# Altium PCB pcb.PcbDoc (part 2 of 2)
Units mm, origin at the board's own origin, x right, y up, seen from the top; angles counter-clockwise.
Board outline 150 x 136 mm, 2 copper layers (Top Layer, Bottom Layer); 100 components, 101 nets, 620 pads, 663 vias.
Unrouted connection lines stored in the file: 2.
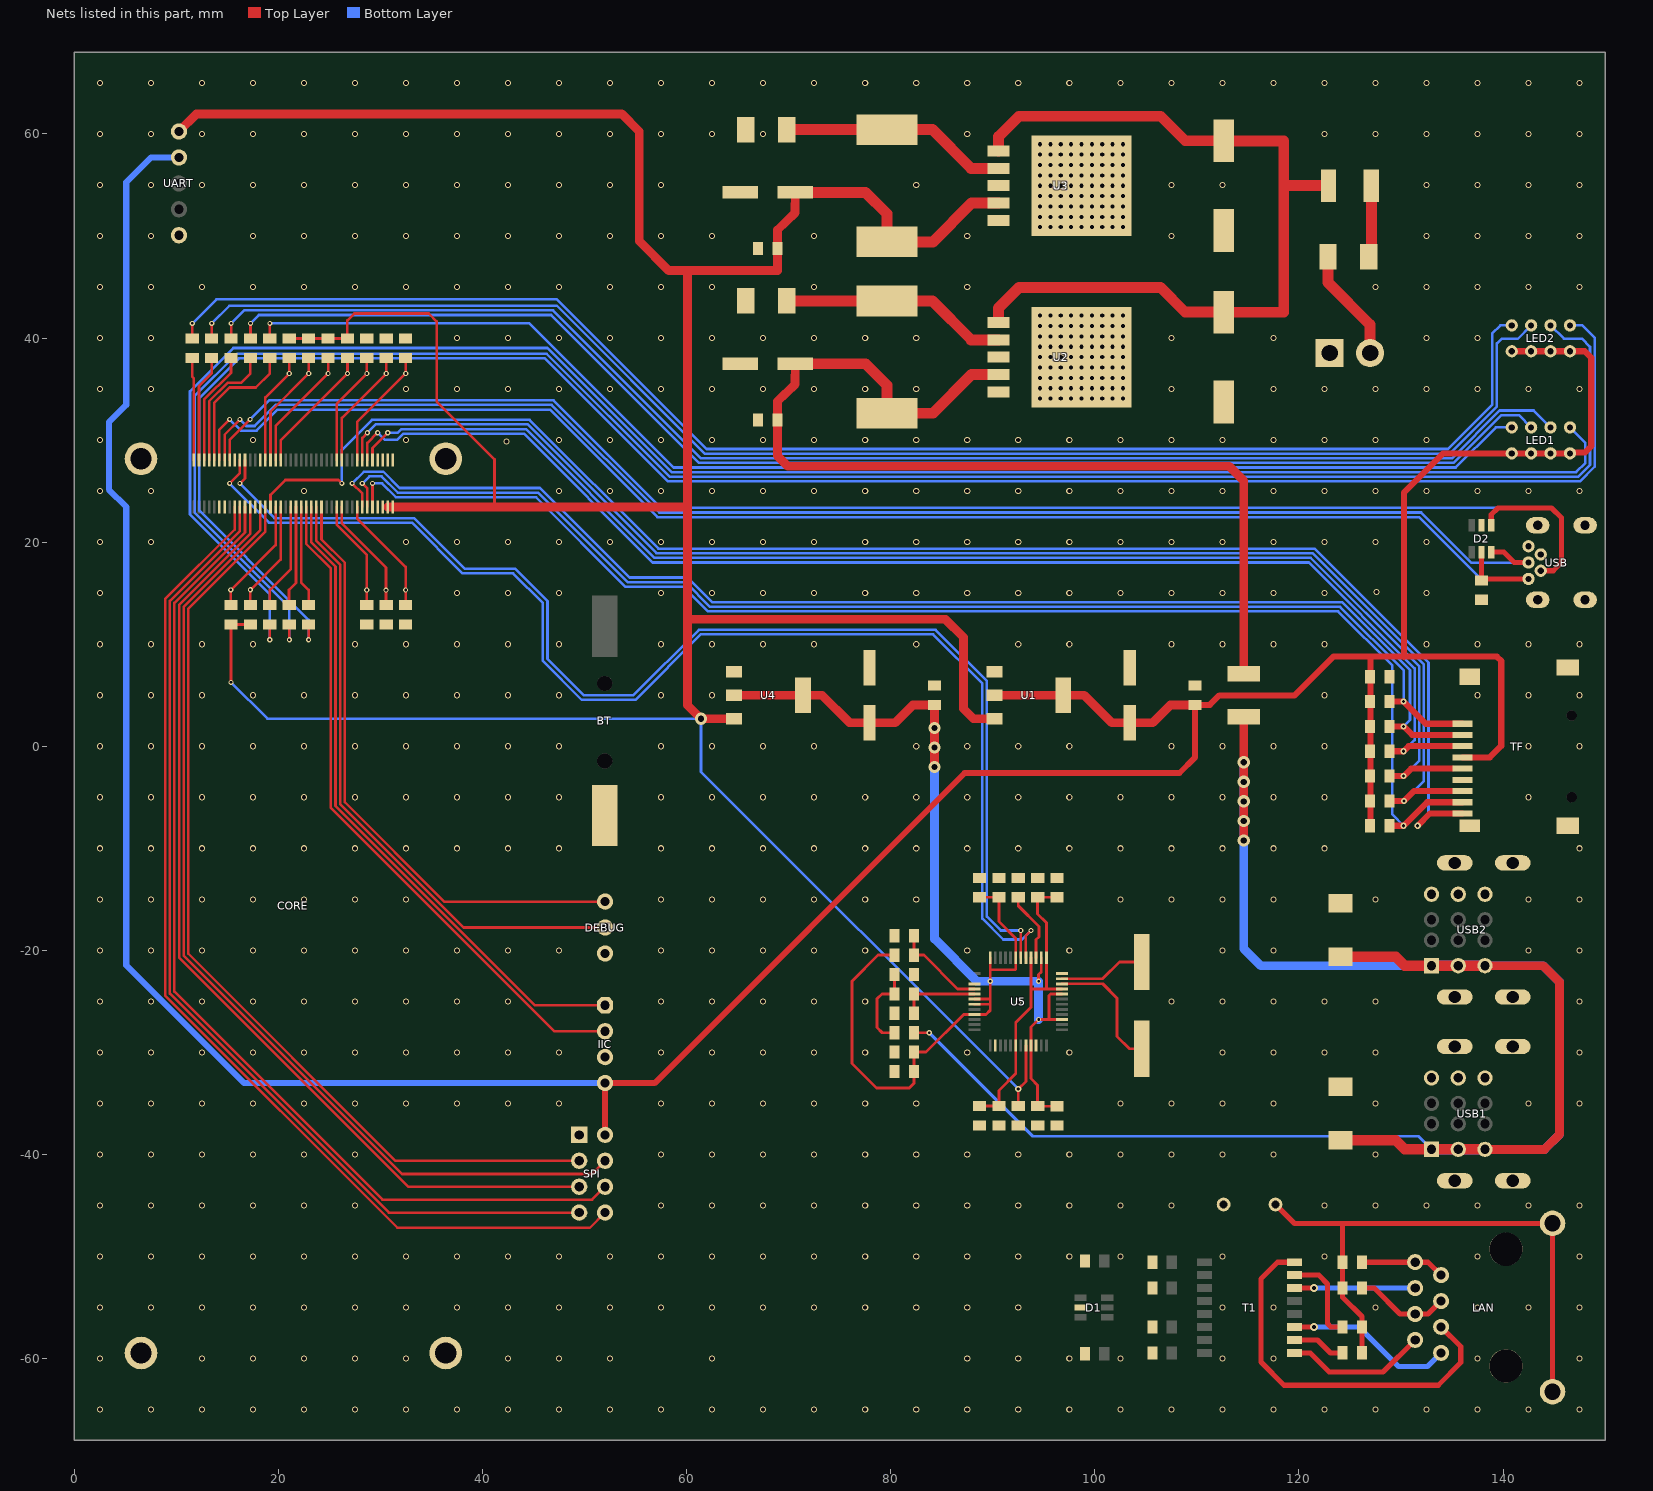
[diagram p2: the nets of this part, all layers, seen from the top]

## Via types
v1: diameter 0.6, hole 0.4, Top Layer to Bottom Layer, tented both sides, 597 vias
v2: diameter 0.508, hole 0.254, Top Layer to Bottom Layer, tented both sides, 47 vias
v3: diameter 1.2, hole 0.6, Top Layer to Bottom Layer, tented both sides, 9 vias
v4: diameter 0.6, hole 0.3, Top Layer to Bottom Layer, 6 vias
v5: diameter 0.8, hole 0.4, Top Layer to Bottom Layer, 2 vias
v6: diameter 0.6, hole 0.3, Top Layer to Bottom Layer, tented bottom, 1 vias
v7: diameter 0.6, hole 0.3, Top Layer to Bottom Layer, tented both sides, 1 vias

## Nets (pads, with @x,y where several pads share a name; then routed paths per layer and width w, separated by ;. In a path a pad name is that pad's centre, name@x,y a point inside that pad or via, vN(x,y) a via of type N, cw(c..) or ccw(c..) an arc to the next point about the centre after c; other vN are vias at no path point) (continued)
GND: BT.2 C1.2 C2.2 C3.2 C4.1 C5.2 C6.1 C7.1 C8.2 C9.1 C10.2 C11.2 C12.2 C13.2 C14.2 C15.2 C16.2 C17.2 C18.2 C19.2 C20.1 C21.1 C22.1 C23.1 C24.1 C25.1 C26.1 C27.1 C28.1 C29.1 C30.1 C31.1 C32.1 CE1.2 CE2.2 CORE.4 CORE.27 CORE.32 CORE.46 CORE.47 CORE.53 CORE.77 D1.5 D2.2 D4.1 D5.1 DEBUG.1 IIC.3 Power.1 R3.2 R4.2 R5.2 R6.2 R7.2 R8.2 R32.1 R33.1 SPI.1 TF.6 TF.10 TF.11 TF.12 TF.13 U1.1 U2.0 U2.3 U2.5 U3.0 U3.3 U3.5 U4.1 U5.10 U5.24 U5.39 UART.1 USB1.4 USB1.8 USB1.12 USB1.13 USB1.14 USB1.15 USB1.16 USB2.4 USB2.8 USB2.12 USB2.13 USB2.14 USB2.15 USB2.16 USB.4 USB.5 USB.6
  other v1: 2.5,-65 7.5,-65 12.5,-65 17.5,-65 22.5,-65 27.5,-65 32.5,-65 37.5,-65 42.5,-65 47.5,-65 52.5,-65 57.5,-65 62.5,-65 67.5,-65 72.5,-65 77.5,-65 82.5,-65 87.5,-65 92.5,-65 97.5,-65 102.5,-65 107.5,-65 112.5,-65 117.5,-65 122.5,-65 127.5,-65 132.5,-65 137.5,-65 142.5,-65 147.5,-65 2.5,-60 12.5,-60 17.5,-60 22.5,-60 27.5,-60 32.5,-60 42.5,-60 47.5,-60 52.5,-60 62.5,-60 87.5,-60 92.5,-60 97.5,-60 102.5,-60 112.5,-60 117.5,-60 137.5,-60 147.5,-60 2.5,-55 7.5,-55 12.5,-55 17.5,-55 22.5,-55 27.5,-55 32.5,-55 37.5,-55 42.5,-55 47.5,-55 52.5,-55 57.5,-55 62.5,-55 67.5,-55 72.5,-55 77.5,-55 82.5,-55 87.5,-55 92.5,-55 112.5,-55 117.5,-55 127.5,-55 137.5,-55 142.5,-55 147.5,-55 2.5,-50 7.5,-50 12.5,-50 17.5,-50 22.5,-50 27.5,-50 32.5,-50 37.5,-50 42.5,-50 47.5,-50 52.5,-50 57.5,-50 62.5,-50 67.5,-50 72.5,-50 77.5,-50 82.5,-50 87.5,-50 92.5,-50 97.5,-50 102.5,-50 112.5,-50 122.5,-50 137.5,-50 147.5,-50 2.5,-45 7.5,-45 12.5,-45 17.5,-45 22.5,-45 27.5,-45 57.5,-45 62.5,-45 67.5,-45 72.5,-45 77.5,-45 82.5,-45 87.5,-45 92.5,-45 97.5,-45 102.5,-45 107.5,-45 122.5,-45 127.5,-45 132.5,-45 137.5,-45 142.5,-45 147.5,-45 2.5,-40 7.5,-40 12.5,-40 17.5,-40 22.5,-40 27.5,-40 57.5,-40 62.5,-40 67.5,-40 72.5,-40 77.5,-40 82.5,-40 87.5,-40 92.5,-40 97.5,-40 102.5,-40 107.5,-40 112.5,-40 117.5,-40 127.5,-40 2.5,-35 7.5,-35 12.5,-35 17.5,-35 22.5,-35 27.5,-35 32.5,-35 37.5,-35 42.5,-35 47.5,-35 57.5,-35 62.5,-35 67.5,-35 72.5,-35 77.5,-35 82.5,-35 102.5,-35 107.5,-35 112.5,-35 117.5,-35 127.5,-35 142.5,-35 147.5,-35 2.5,-30 7.5,-30 12.5,-30 17.5,-30 22.5,-30 27.5,-30 32.5,-30 37.5,-30 42.5,-30 47.5,-30 57.5,-30 62.5,-30 67.5,-30 72.5,-30 77.5,-30 87.5,-30 97.5,-30 112.5,-30 117.5,-30 122.5,-30 127.5,-30 147.5,-30 2.5,-25 7.5,-25 12.5,-25 17.5,-25 22.5,-25 27.5,-25 32.5,-25 37.5,-25 42.5,-25 57.5,-25 62.5,-25 67.5,-25 72.5,-25 77.5,-25 92.5,-25 107.5,-25 112.5,-25 117.5,-25 122.5,-25 127.5,-25 147.5,-25 2.5,-20 7.5,-20 12.5,-20 17.5,-20 22.5,-20 27.5,-20 32.5,-20 37.5,-20 42.5,-20 47.5,-20 57.5,-20 62.5,-20 67.5,-20 72.5,-20 77.5,-20 87.5,-20 97.5,-20 112.5,-20 117.5,-20 142.5,-20 147.5,-20 2.5,-15 7.5,-15 12.5,-15 17.5,-15 22.5,-15 27.5,-15 32.5,-15 57.5,-15 62.5,-15 67.5,-15 72.5,-15 77.5,-15 82.5,-15 102.5,-15 107.5,-15 112.5,-15 117.5,-15 127.5,-15 142.5,-15 147.5,-15 2.5,-10 7.5,-10 12.5,-10 17.5,-10 22.5,-10 27.5,-10 32.5,-10 37.5,-10 42.5,-10 47.5,-10 57.5,-10 62.5,-10 67.5,-10 72.5,-10 77.5,-10 82.5,-10 87.5,-10 92.5,-10 97.5,-10 102.5,-10 107.5,-10 112.5,-10 117.5,-10 122.5,-10 147.5,-10 2.5,-5 7.5,-5 12.5,-5 17.5,-5 22.5,-5 27.5,-5 32.5,-5 37.5,-5 42.5,-5 47.5,-5 57.5,-5 62.5,-5 67.5,-5 72.5,-5 77.5,-5 82.5,-5 87.5,-5 92.5,-5 97.5,-5 102.5,-5 107.5,-5 112.5,-5 117.5,-5 122.5,-5 142.5,-5 2.5,0 7.5,0 12.5,0 17.5,0 22.5,0 27.5,0 32.5,0 37.5,0 42.5,0 47.5,0 57.5,0 62.5,0 67.5,0 72.5,0 82.5,0 87.5,0 92.5,0 97.5,0 107.5,0 112.5,0 117.5,0 122.5,0 142.5,0 147.5,0 2.5,5 7.5,5 12.5,5 17.5,5 22.5,5 27.5,5 32.5,5 37.5,5 42.5,5 47.5,5 57.5,5 62.5,5 122.5,5 137.5,5 142.5,5 147.5,5 2.5,10 7.5,10 12.5,10 17.5,10 27.5,10 32.5,10 37.5,10 42.5,10 47.5,10 57.5,10 62.5,10 67.5,10 72.5,10 82.5,10 92.5,10 97.5,10 107.5,10 112.5,10 117.5,10 122.5,10 132.5,10 137.5,10 142.5,10 147.5,10 2.5,15 37.5,15 42.5,15 47.5,15 57.5,15 62.5,15 67.5,15 72.5,15 77.5,15 82.5,15 87.5,15 92.5,15 97.5,15 102.5,15 107.5,15 112.5,15 117.5,15 122.5,15 132.5,15 127.62,15.12 2.5,20 7.5,20 32.5,20 37.5,20 42.5,20 47.5,20 52.5,20 57.5,20 62.5,20 67.5,20 72.5,20 77.5,20 82.5,20 87.5,20 92.5,20 97.5,20 102.5,20 107.5,20 112.5,20 117.5,20 122.5,20 127.5,20 132.5,20 2.5,25 7.5,25 22.5,25 47.5,25 52.5,25 57.5,25 62.5,25 67.5,25 72.5,25 77.5,25 82.5,25 87.5,25 92.5,25 97.5,25 102.5,25 107.5,25 112.5,25 117.5,25 122.5,25 127.5,25 132.5,25 137.5,25 142.5,25 147.5,25 42.35,29.85 2.5,30 17.5,30 32.5,30 47.5,30 52.5,30 57.5,30 62.5,30 67.5,30 72.5,30 77.5,30 82.5,30 87.5,30 92.5,30 97.5,30 102.5,30 107.5,30 112.5,30 117.5,30 122.5,30 127.5,30 132.5,30 2.5,35 7.5,35 32.5,35 37.5,35 42.5,35 47.5,35 52.5,35 57.5,35 62.5,35 67.5,35 72.5,35 77.5,35 82.5,35 107.5,35 117.5,35 122.5,35 127.5,35 132.5,35 137.5,35 142.5,35 147.5,35 2.5,40 7.5,40 37.5,40 42.5,40 47.5,40 52.5,40 57.5,40 62.5,40 67.5,40 72.5,40 77.5,40 82.5,40 107.5,40 117.5,40 132.5,40 137.5,40 2.5,45 7.5,45 12.5,45 17.5,45 22.5,45 27.5,45 32.5,45 37.5,45 42.5,45 47.5,45 52.5,45 57.5,45 62.5,45 72.5,45 87.5,45 127.5,45 132.5,45 137.5,45 142.5,45 147.5,45 2.5,50 7.5,50 17.5,50 22.5,50 27.5,50 32.5,50 37.5,50 42.5,50 47.5,50 52.5,50 57.5,50 62.5,50 72.5,50 87.5,50 107.5,50 132.5,50 137.5,50 142.5,50 147.5,50 2.5,55 7.5,55 12.5,55 17.5,55 22.5,55 27.5,55 32.5,55 37.5,55 42.5,55 47.5,55 52.5,55 57.5,55 82.5,55 107.5,55 112.5,55 132.5,55 137.5,55 142.5,55 147.5,55 2.5,60 7.5,60 12.5,60 17.5,60 22.5,60 27.5,60 32.5,60 37.5,60 42.5,60 47.5,60 52.5,60 57.5,60 62.5,60 67.5,60 87.5,60 122.5,60 127.5,60 132.5,60 137.5,60 142.5,60 147.5,60 2.5,65 7.5,65 12.5,65 17.5,65 22.5,65 27.5,65 32.5,65 37.5,65 42.5,65 47.5,65 52.5,65 57.5,65 62.5,65 67.5,65 72.5,65 77.5,65 82.5,65 87.5,65 92.5,65 97.5,65 102.5,65 107.5,65 112.5,65 117.5,65 122.5,65 127.5,65 132.5,65 137.5,65 142.5,65 147.5,65
LED1: CORE.62 R13.2 | length 9.9
  Top Layer w0.254: CORE.62@22.22,23.455 22.22,16.067 22.958,15.33 R13.2@22.958,13.83
LED2: CORE.61 R14.2 | length 9.9
  Top Layer w0.254: R14.2@21.038,13.82 21.038,15.32 21.72,16.002 CORE.61@21.72,23.455
LED3: CORE.60 R17.2 | length 10.5
  Top Layer w0.254: R17.2@19.156,13.83 19.158,15.33 21.22,17.392 CORE.60@21.22,23.455
LED4: CORE.38 R18.2 | length 11.1
  Top Layer w0.254: CORE.38@12.72,28.055 12.72,33.96 15.35,36.59 R18.2@15.35,38.033
LED5: CORE.37 R19.2 | length 12.4
  Top Layer w0.254: CORE.37@13.22,28.055 13.22,33.818 15.016,35.614 16.331,35.614 17.25,36.533 R19.2@17.25,38.033
LED6: CORE.36 R20.2 | length 13.7
  Top Layer w0.254: CORE.36@13.72,28.055 13.72,33.676 15.204,35.16 17.778,35.16 19.151,36.533 R20.2@19.151,38.033
LED7: CORE.39 R15.2 | length 10.5
  Top Layer w0.254: CORE.39@12.22,28.055 12.22,35.304 13.449,36.533 R15.2@13.449,38.033
LED8: CORE.40 R16.2 | length 10
  Top Layer w0.254: R16.2@11.549,38.033 11.549,36.231 11.72,36.06 CORE.40@11.72,28.055
NetC10_1: C10.1 C11.1 F1.1 U2.1 U3.1 | length 83.7
  Top Layer w0.254: 118.517,55.25 118.837,54.93
  Top Layer w1.07: U2.1@90.57,41.53 90.57,42.933 92.577,44.94 106.457,44.94 108.863,42.534 C10.1@112.643,42.534 ; U3.1@90.57,58.33 90.57,59.733 92.577,61.74 106.457,61.74 108.863,59.334 C11.1@112.643,59.334 ; C10.1@112.647,42.53 118.517,42.53 118.517,55.25 118.517,59.33 C11.1@112.647,59.33 ; 118.837,54.93 F1.1@122.897,54.93
NetC32_2: C32.2 LB1.1 R34.1 | length 8.5
  Top Layer w0.279: LB1.1@80.37,-28.07 79.173,-28.07 78.67,-27.567 78.67,-24.746 79.146,-24.27 R34.1@80.371,-24.27 C32.2@80.371,-22.37
NetCORE_8: CORE.8 R7.1 | length 11.9
  Top Layer w0.254: CORE.8@27.72,28.055 27.72,31.777 v2(32.47,36.527) R7.1@32.47,38.027
NetCORE_11: CORE.11 R6.1 | length 11.8
  Top Layer w0.254: CORE.11@26.22,28.055 26.22,32.177 v2(30.57,36.527) R6.1@30.57,38.027
NetCORE_12: CORE.12 R4.1 | length 11.2
  Top Layer w0.254: CORE.12@25.72,28.055 25.72,33.578 v2(28.669,36.527) R4.1@28.669,38.027
NetCORE_23: CORE.23 R9.1 | length 12.7
  Top Layer w0.254: CORE.23@20.22,28.055 20.22,29.978 v2(26.769,36.527) R9.1@26.769,38.027
NetCORE_24: CORE.24 R10.1 | length 12.1
  Top Layer w0.254: CORE.24@19.72,28.055 19.72,31.379 v2(24.868,36.527) R10.1@24.868,38.027
NetCORE_25: CORE.25 R11.1 | length 11.5
  Top Layer w0.254: CORE.25@19.22,28.055 19.22,32.779 v2(22.968,36.527) R11.1@22.968,38.027
NetCORE_26: CORE.26 R12.1 | length 10.9
  Top Layer w0.254: CORE.26@18.72,28.055 18.72,34.179 v2(21.067,36.527) R12.1@21.067,38.027
NetCORE_57: CORE.57 R1.1 | length 11.5
  Top Layer w0.254: R1.1@15.334,13.82 v2(15.334,15.32) 19.72,19.706 CORE.57@19.72,23.455
NetCORE_58: CORE.58 R2.1 | length 10.9
  Top Layer w0.254: R2.1@17.254,13.83 v2(17.254,15.33) 20.22,18.296 CORE.58@20.22,23.455
NetCORE_69: CORE.69 R3.1 | length 10.9
  Top Layer w0.254: CORE.69@25.72,23.455 25.72,21.698 28.66,18.758 v2(28.66,15.31) R3.1@28.66,13.81
NetCORE_70: CORE.70 R5.1 | length 11.4
  Top Layer w0.254: CORE.70@26.22,23.455 26.22,21.84 30.54,17.52 v2(30.54,15.3) R5.1@30.54,13.8
NetCORE_73: CORE.73 R8.1 | length 11.6
  Top Layer w0.254: CORE.73@27.72,23.455 27.72,22.32 32.46,17.58 v2(32.46,15.31) R8.1@32.46,13.81
NetD3_2: D3.2 F1.2 | length 6.7
  Top Layer w1.07: D3.2@127.097,48.21 F1.2@127.097,54.93
NetD4_2: D4.2 L1.2 U2.2 | length 22.3
  Top Layer w1.07: D4.2@69.807,43.634 L1.2@79.643,43.634 ; L1.2@79.647,43.63 84.087,43.63 87.887,39.83 U2.2@90.57,39.83
NetD5_2: D5.2 L2.2 U3.2 | length 22.3
  Top Layer w1.07: D5.2@69.807,60.434 L2.2@79.643,60.434 ; L2.2@79.647,60.43 84.087,60.43 87.887,56.63 U3.2@90.57,56.63
NetLAN_4: LAN.4 LAN.5 R29.2 | length 9.3
  Top Layer w0.508: R29.2@126.18,-53.095 127.375,-53.095 129.915,-55.635 LAN.4@131.393,-55.635 132.663,-55.635 LAN.5@133.933,-54.365
NetLAN_7: LAN.7 LAN.8 R30.2 | length 8.3
  Top Layer w0.508: R30.2@126.18,-50.555 LAN.8@131.393,-50.555 132.663,-50.555 LAN.7@133.933,-51.825
NetLED1_2: LED1.2 R20.1 | length 130.7
  Top Layer w0.254: R20.1@19.161,39.94 v2(19.161,41.44)
  Bottom Layer w0.254: v2(19.161,41.44) 44.596,41.44 58.724,27.312 135.36,27.312 139.293,31.245 LED1.2@140.86,31.245
NetLED1_4: LED1.4 R19.1 | length 135.8
  Top Layer w0.254: R19.1@17.26,39.96 v2(17.26,41.44)
  Bottom Layer w0.254: v2(17.26,41.44) 18.078,42.258 46.726,42.258 61.218,27.766 135.172,27.766 139.852,32.446 141.559,32.446 LED1.4@142.76,31.245
NetLED1_6: LED1.6 R18.1 | length 139.9
  Top Layer w0.254: R18.1@15.36,39.96 v2(15.36,41.44)
  Bottom Layer w0.254: v2(15.36,41.44) 16.632,42.712 46.914,42.712 61.406,28.22 134.984,28.22 139.664,32.9 143.005,32.9 LED1.6@144.66,31.245
NetLED1_8: LED1.8 R17.1 | length 177.1
  Top Layer w0.254: v2(19.155,10.43) R17.1@19.156,11.93
  Bottom Layer w0.254: v2(19.155,10.43) 19.155,14.891 11.334,22.712 11.334,34.784 15.58,39.03 46.364,39.03 58.536,26.858 147.164,26.858 148.072,27.766 148.072,29.733 LED1.8@146.56,31.245
NetLED2_2: LED2.2 R16.1 | length 146.9
  Top Layer w0.254: R16.1@11.559,39.96 v2(11.559,41.44)
  Bottom Layer w0.254: v2(11.559,41.44) 13.919,43.8 47.29,43.8 61.962,29.128 134.608,29.128 138.94,33.46 138.94,40.44 139.745,41.245 LED2.2@140.86,41.245
NetLED2_4: LED2.4 R15.1 | length 146.3
  Top Layer w0.254: R15.1@13.459,39.96 v2(13.459,41.44)
  Bottom Layer w0.254: v2(13.459,41.44) 15.185,43.166 47.282,43.166 61.774,28.674 134.796,28.674 139.394,33.272 139.394,39.464 139.86,39.93 141.445,39.93 LED2.4@142.76,41.245
NetLED2_6: LED2.6 R14.1 | length 189.4
  Top Layer w0.254: v2(21.075,10.44) R14.1@21.075,11.94
  Bottom Layer w0.254: v2(21.075,10.44) 21.075,13.613 19.609,15.079 11.788,22.9 11.788,34.3 15.952,38.464 46.288,38.464 58.348,26.404 147.352,26.404 148.526,27.578 148.526,39.134 147.72,39.94 145.965,39.94 LED2.6@144.66,41.245
NetLED2_8: LED2.8 R13.1 | length 189.1
  Top Layer w0.254: v2(22.955,10.43) R13.1@22.955,11.93
  Bottom Layer w0.254: v2(22.955,10.43) 22.955,12.375 21.529,13.801 12.242,23.088 12.242,34.112 16.14,38.01 46.1,38.01 58.16,25.95 147.54,25.95 148.98,27.39 148.98,40.04 147.775,41.245 LED2.8@146.56,41.245
NetR27_1: R27.1 T1.10 | length 5.2
  Top Layer w0.508: T1.10@119.57,-58.175 121.825,-58.175 123.095,-59.445 R27.1@124.28,-59.445
NetR28_1: R28.1 T1.15 | length 9.1
  Top Layer w0.508: T1.15@119.57,-51.825 121.945,-51.825 122.8,-52.68 122.8,-56.58 123.125,-56.905 R28.1@124.28,-56.905
NetU5_22: U5.22 Y1.2 | length 12.6
  Top Layer w0.279: U5.22@96.8,-23.28 100.773,-23.28 102.19,-24.697 102.19,-28.43 103.4,-29.64 Y1.2@104.6,-29.64
NetU5_23: U5.23 Y1.1 | length 8.5
  Top Layer w0.279: U5.23@96.8,-22.78 100.766,-22.78 102.406,-21.14 Y1.1@104.6,-21.14
PJ_GND: C8.1 LAN.0 R27.2 R28.2 R29.1 R30.1 | length 57.9
  Top Layer w0.508: C8.1@117.7,-44.9 119.555,-46.755 LAN.0@144.853,-46.755 LAN.0@144.853,-63.245 ; 124.28,-46.78 R30.1@124.28,-50.555 R29.1@124.28,-53.095 124.28,-53.99 126.18,-55.89 R28.2@126.18,-56.905 R27.2@126.18,-59.445
REXT: R32.2 U5.27 | length 6.9
  Top Layer w0.279: R32.2@92.5,-14.8 92.5,-15.627 94.52,-17.647 94.52,-18.677 94.25,-18.947 U5.27@94.25,-20.73
RX1+: LAN.1 T1.11 | length 16.5
  Top Layer w0.508: T1.11@119.57,-56.905 v5(121.47,-56.905)
  Bottom Layer w0.508: v5(121.47,-56.905) 125.885,-56.905 129.76,-60.78 132.598,-60.78 LAN.1@133.933,-59.445
RX1-: LAN.2 T1.9 | length 13.9
  Top Layer w0.508: T1.9@119.57,-59.445 121.105,-59.445 122.98,-61.32 128.248,-61.32 LAN.2@131.393,-58.175
RXD-DEBUG: CORE.66 DEBUG.3 | length 59.4
  Top Layer w0.254: CORE.66@24.22,23.455 24.22,20.27 26.5,17.99 26.5,-5.48 36.243,-15.223 DEBUG.3@52.01,-15.223
SCL: CORE.64 IIC.1 | length 64.8
  Top Layer w0.254: CORE.64@23.22,23.455 23.22,19.986 25.592,17.614 25.592,-5.856 45.119,-25.383 IIC.1@52.01,-25.383
SD_CLK: CORE.5 R23.1 TF.5 | length 132
  Top Layer w0.254: CORE.5@29.22,28.055 29.22,29.23 v2(30.72,30.73)
  Top Layer w0.6: R23.1@128.881,-2.923 v4(130.261,-2.923) 130.994,-2.19 TF.5@135.03,-2.19
  Bottom Layer w0.254: v2(30.72,30.73) 31.701,30.73 32.052,31.081 44.248,31.081 56.864,18.465 121.161,18.465 131.796,7.83 131.796,-1.388 v4(130.261,-2.923)
SD_CMD: CORE.6 R24.1 TF.3 | length 130.9
  Top Layer w0.254: CORE.6@28.72,28.055 28.72,29.73 v2(29.72,30.73)
  Top Layer w0.6: R24.1@128.881,-0.49 v4(130.261,-0.49) 130.761,0.01 TF.3@136.03,0.01
  Bottom Layer w0.254: v2@29.898,30.73 v2(29.72,30.73) 30.41,30.04 31.653,30.04 32.24,30.627 44.06,30.627 56.676,18.011 120.973,18.011 131.342,7.642 131.342,0.591 v4(130.261,-0.49)
SD_DAT0: CORE.7 R22.1 TF.7 | length 138.1
  Top Layer w0.254: CORE.7@28.22,28.055 28.22,30.23 v2(28.72,30.73)
  Top Layer w0.6: R22.1@128.934,-5.347 v4(130.314,-5.347) 131.271,-4.39 TF.7@136.03,-4.39
  Bottom Layer w0.254: v2(28.72,30.73) 29.525,31.535 44.436,31.535 57.052,18.919 121.349,18.919 132.25,8.018 132.25,-3.411 v4(130.314,-5.347)
SD_DAT1: CORE.76 R21.1 TF.8 | length 133.9
  Top Layer w0.254: CORE.76@29.22,23.455 v2(29.22,25.755)
  Top Layer w0.6: R21.1@128.881,-7.79 v4(130.261,-7.79) 132.561,-5.49 TF.8@136.03,-5.49
  Bottom Layer w0.254: v2(29.22,25.755) 30.151,25.755 31.504,24.402 45.254,24.402 54.029,15.627 59.702,15.627 62.117,13.212 123.846,13.212 129.149,7.909 129.149,-6.678 v4(130.261,-7.79)
SD_DAT2: CORE.75 R26.1 TF.1 | length 123.8
  Top Layer w0.254: v2(28.22,25.755) 28.72,25.255 CORE.75@28.72,23.455
  Top Layer w0.6: R26.1@128.881,4.377 v4(130.261,4.377) 132.427,2.21 TF.1@136.03,2.21
  Bottom Layer w0.254: v2(28.22,25.755) 28.911,26.446 30.102,26.446 31.692,24.856 45.442,24.856 54.217,16.081 59.89,16.081 62.305,13.666 124.034,13.666 130.28,7.42 v4@130.28,4.377
SD_DAT3: CORE.74 R25.1 TF.2 | length 128.2
  Top Layer w0.254: v2(27.22,25.755) 28.22,24.755 CORE.74@28.22,23.455
  Top Layer w0.6: R25.1@128.881,1.943 v4(130.261,1.943) 131.094,1.11 TF.2@136.03,1.11
  Bottom Layer w0.254: v2(27.22,25.755) 28.365,26.9 30.29,26.9 31.88,25.31 45.63,25.31 54.405,16.535 60.078,16.535 62.493,14.12 124.222,14.12 130.888,7.454 130.888,2.57 v4(130.261,1.943)
SD_DETECT: CORE.56 TF.9 | length 151.1
  Top Layer w0.254: CORE.56@19.22,23.455 19.22,24.63 20.68,26.09 25.885,26.09 v2(26.22,25.755)
  Top Layer w0.6: v6(131.641,-7.79) 132.841,-6.59 TF.9@136.03,-6.59
  Bottom Layer w0.254: v2(26.22,25.755) 26.22,29.052 29.157,31.989 44.624,31.989 57.24,19.373 121.537,19.373 132.704,8.206 132.704,-6.727 v6(131.641,-7.79)
SDA: CORE.63 IIC.2 | length 66.4
  Top Layer w0.254: CORE.63@22.72,23.455 22.72,19.844 25.138,17.426 25.138,-6.044 47.017,-27.923 IIC.2@52.01,-27.923
SPI_CLK: CORE.52 SPI.5 | length 95.6
  Top Layer w0.254: CORE.52@17.22,23.455 17.22,20.814 10.262,13.856 10.262,-20.71 32.708,-43.156 49.466,-43.156 SPI.5@49.47,-43.16
SPI_CS5: CORE.50 SPI.7 | length 99.5
  Top Layer w0.254: CORE.50@16.22,23.455 16.22,21.098 9.354,14.232 9.354,-24.226 30.828,-45.7 SPI.7@49.47,-45.7
SPI_CS6: CORE.49 SPI.8 | length 103.9
  Top Layer w0.254: CORE.49@15.72,23.455 15.72,21.24 8.9,14.42 8.9,-24.414 31.67,-47.184 50.526,-47.184 SPI.8@52.01,-45.7
SPI_CS7: CORE.55 SPI.3 | length 93.6
  Top Layer w0.254: CORE.55@18.72,23.455 18.72,21.03 11.17,13.48 11.17,-20.334 31.456,-40.62 SPI.3@49.47,-40.62
SPI_MISO: CORE.54 SPI.4 | length 97.8
  Top Layer w0.254: CORE.54@18.22,23.455 18.22,21.172 10.716,13.668 10.716,-20.522 32.108,-41.914 50.716,-41.914 SPI.4@52.01,-40.62
SPI_MOSI: CORE.51 SPI.6 | length 101.5
  Top Layer w0.254: CORE.51@16.72,23.455 16.72,20.956 9.808,14.044 9.808,-24.038 30.19,-44.42 50.75,-44.42 SPI.6@52.01,-43.16
TESTJ: U5.2
TX1+: LAN.3 T1.16 | length 37.8
  Top Layer w0.508: T1.16@119.57,-50.555 117.915,-50.555 116.28,-52.19 116.28,-60.34 118.55,-62.61 133.65,-62.61 135.86,-60.4 135.86,-58.832 LAN.3@133.933,-56.905
TX1-: LAN.6 T1.14 | length 11.8
  Top Layer w0.508: T1.14@119.57,-53.095 v5(121.47,-53.095)
  Bottom Layer w0.508: v5(121.47,-53.095) LAN.6@131.393,-53.095
TXD-DEBUG: CORE.65 DEBUG.2 | length 61.1
  Top Layer w0.254: CORE.65@23.72,23.455 23.72,20.128 26.046,17.802 26.046,-5.668 38.141,-17.763 DEBUG.2@52.01,-17.763
USBD_DN: CORE.33 D2.1 USB.2 | length 160.9
  Top Layer w0.254: CORE.33@15.22,28.055 15.22,30.025 v2(17.22,32.025)
  Top Layer w0.508: D2.1@138.85,21.65 138.85,22.7 139.51,23.36 144.76,23.36 145.73,22.39 145.73,18 144.93,17.2 USB.2@143.7,17.2
  Bottom Layer w0.254: v2(17.22,32.025) 19.095,33.9 46.97,33.9 57.51,23.36 144.76,23.36 145.71,22.41 145.71,17.98 144.93,17.2 USB.2@143.7,17.2
USBD_DP: CORE.34 D2.6 USB.3 | length 142.5
  Top Layer w0.254: CORE.34@14.72,28.055 14.72,30.525 v2(16.22,32.025)
  Top Layer w0.508: D2.6@138.85,19.03 140.07,19.03 141.1,18 USB.3@142.5,18
  Bottom Layer w0.254: v2(16.22,32.025) 16.861,31.384 17.672,31.384 19.734,33.446 46.782,33.446 57.324,22.904 131.978,22.904 136.882,18 USB.3@142.5,18
USBD_VBUS: C9.2 CORE.35 D2.5 USB.1 | length 147.1
  Top Layer w0.254: CORE.35@14.22,28.055 14.22,31.025 v2(15.22,32.025)
  Top Layer w0.508: C9.2@137.899,16.251 D2.5@137.899,19.03 ; C9.2@138.048,16.4 USB.1@142.5,16.4
  Bottom Layer w0.254: v2(15.22,32.025) 16.315,30.93 17.86,30.93 19.922,32.992 46.594,32.992 57.136,22.45 131.79,22.45 137.84,16.4 USB.1@142.5,16.4
USBH_DN: CORE.31 U5.29 | length 125.1
  Top Layer w0.254: v2(15.22,25.755) 16.22,26.755 CORE.31@16.22,28.055 ; U5.29@93.25,-20.73 93.25,-18.555 v2(93.75,-18.055)
  Bottom Layer w0.254: v2(15.22,25.755) 19.071,21.904 33.102,21.904 38.056,16.95 43,16.95 45.91,14.04 45.91,8.36 49.724,4.546 54.968,4.546 61.382,10.96 84.152,10.96 88.976,6.136 88.976,-16.885 91.028,-18.937 92.868,-18.937 v2(93.75,-18.055)
USBH_DP: CORE.30 U5.30 | length 122
  Top Layer w0.254: v2(16.22,25.755) 16.72,26.255 CORE.30@16.72,28.055 ; U5.30@92.75,-20.73 v2(92.75,-18.055)
  Bottom Layer w0.254: v2(16.22,25.755) 19.617,22.358 33.29,22.358 38.244,17.404 43.188,17.404 46.364,14.228 46.364,8.548 49.912,5 54.78,5 61.194,11.414 84.396,11.414 89.43,6.38 89.43,-16.697 90.788,-18.055 v2(92.75,-18.055)
V18: C21.2 C26.2 C27.2 C29.2 U5.6 U5.21 U5.25 U5.28 | length 32
  Top Layer w0.279: C27.2@88.7,-35.26 C26.2@90.6,-35.26 90.6,-33.72 92.25,-32.07 U5.6@92.25,-29.33 92.25,-27.08 93.75,-25.58 93.75,-23.78 95.26,-23.78 ; 93.75,-23.767 U5.28@93.75,-20.73 ; C29.2@96.3,-14.8 C21.2@94.4,-14.8 94.4,-16.447 95.25,-17.297 U5.25@95.25,-20.73 95.25,-23.77 95.26,-23.78 ; U5.21@96.8,-23.78 95.26,-23.78
VBUSM: R33.2 R34.2 U5.41 | length 7.8
  Top Layer w0.279: R33.2@82.271,-26.17 R34.2@82.271,-24.27 82.281,-24.28 U5.41@88.2,-24.28
VCC_5V: C15.1 C17.1 C20.2 CORE.1 CORE.2 CORE.3 CORE.78 CORE.79 CORE.80 L2.1 R1.2 R2.2 R9.2 R10.2 R11.2 R12.2 U1.3 U3.4 U4.3 U5.8 UART.5 | length 368.6
  Top Layer w0.254: v2(15.352,6.261) R1.2@15.352,11.93 R2.2@17.254,11.93 ; R12.2@21.057,39.96 R11.2@22.958,39.96 R10.2@24.858,39.96 R9.2@26.759,39.96 26.759,41.729 27.44,42.41 34.73,42.41 35.51,41.63 35.51,33.78 41.17,28.12 41.17,23.46
  Top Layer w0.279: C20.2@92.5,-35.26 v7(92.5,-33.597) 93.25,-32.847 U5.8@93.25,-29.33
  Top Layer w0.864: UART.5@10.25,60.24 11.98,61.97 53.63,61.97 55.36,60.24 55.36,49.51 58.26,46.61 60.09,46.61 ; CORE.79@30.72,23.46 41.17,23.46 60.09,23.46 ; 60.12,12.45 85.36,12.45 87.13,10.68 87.13,3.68 88.11,2.7 U1.3@90.155,2.7 ; U4.3@64.645,2.7 v3(61.41,2.7) 60.09,4.02 60.09,23.46 ; C15.1@70.647,54.28 70.633,52.292 68.91,50.593 68.897,48.767 68.897,46.61 60.09,46.61 ; 60.09,23.46 60.09,46.61
  Top Layer w1.07: C15.1@70.647,54.28 77.547,54.28 79.647,52.18 L2.1@79.647,49.43 84.127,49.43 87.927,53.23 U3.4@90.57,53.23
  Bottom Layer w0.254: v2(15.352,6.261) 18.913,2.7 v3(61.41,2.7) 61.41,-2.507 v7(92.5,-33.597)
VCC_12V: D3.1 Power.2 | length 11.1
  Top Layer w1.07: D3.1@122.857,47.97 122.857,45.43 126.977,41.31 Power.2@126.977,38.53
VCC_CORE_3.3V: C1.1 C12.1 C13.1 IIC.4 LED1.1 LED1.3 LED1.5 LED1.7 LED2.1 LED2.3 LED2.5 LED2.7 R21.2 R22.2 R23.2 R24.2 R25.2 R26.2 SPI.2 TF.4 U1.2 U1.4 UART.4 | length 353.2
  Top Layer w0.6: SPI.2@52.01,-38.08 IIC.4@52.01,-33.003 56.867,-33.003 87.25,-2.62 108.3,-2.62 109.81,-1.11 C13.1@109.81,4.05 111.27,4.05 112.21,4.99 119.58,4.99 123.38,8.79 127,8.79 ; R21.2@127,-7.79 127,-2.923 127,1.943 127,8.79 ; 130.31,8.74 130.31,8.79 ; TF.4@136.03,-1.09 138.71,-1.09 139.83,0.03 139.83,8.37 139.41,8.79 130.31,8.79 ; LED2.1@140.86,38.705 LED2.3@142.76,38.705 LED2.5@144.66,38.705 LED2.7@146.56,38.705 148.015,38.705 148.65,38.07 148.65,29.41 148.01,28.77 LED1.7@146.625,28.77 ; LED1.7@146.56,28.705 LED1.5@144.66,28.705 LED1.3@142.76,28.705 LED1.1@140.86,28.705 134.145,28.705 130.31,24.87 130.31,8.79 ; 127,8.79 130.31,8.79
  Top Layer w0.864: U1.2@90.155,5 U1.4@96.905,5 98.97,5 101.67,2.3 C12.1@103.42,2.3 105.68,2.3 107.43,4.05 C13.1@109.81,4.05
  Bottom Layer w0.6: UART.4@10.25,57.7 7.52,57.7 5.09,55.27 5.09,33.446 3.39,31.746 3.39,25.155 5.09,23.455 5.09,20.145 5.09,-21.459 16.635,-33.003 IIC.4@52.01,-33.003 ; LED1.7@146.56,28.705 LED1.7@146.625,28.77
VCC_ETHERNET_3.3V: C18.1 C19.1 C22.2 C24.2 C25.2 C28.2 C30.2 C31.2 R31.1 U4.2 U4.4 U5.9 U5.15 U5.20 U5.26 U5.31 U5.36 U5.42 U5.43 U5.45 | length 136.3
  Top Layer w0.279: R31.1@80.371,-20.47 78.766,-20.47 76.21,-23.026 76.21,-31.077 78.62,-33.487 81.82,-33.487 82.28,-33.027 82.28,-31.878 C30.2@82.271,-31.87 82.27,-31.869 C31.2@82.27,-29.97 83.46,-29.97 87.15,-26.28 U5.45@88.2,-26.28 89.346,-26.28 89.75,-25.877 89.75,-25.287 ; U5.43@88.2,-25.28 89.743,-25.28 89.75,-25.287 ; U5.42@88.2,-24.78 89.75,-24.78 89.75,-25.287 ; C28.2@88.7,-14.8 C24.2@90.6,-14.8 90.6,-17.187 92.25,-18.837 U5.31@92.25,-20.73 92.25,-21.827 92.18,-21.897 89.78,-21.897 ; 89.75,-24.747 v2(89.75,-23.019) U5.36@89.75,-20.73 ; v2(94.487,-23.019) 94.487,-22.368 94.75,-22.105 U5.26@94.75,-20.73 ; 95.52,-26.767 95.52,-24.427 95.666,-24.28 U5.20@96.8,-24.28 ; C25.2@96.3,-35.27 94.42,-35.27 C22.2@94.4,-35.25 94.4,-33.217 93.75,-32.567 U5.9@93.75,-29.33 93.75,-27.518 v2(94.487,-26.78) U5.15@96.8,-26.78
  Top Layer w0.864: U4.2@64.645,5 U4.4@71.395,5 73.27,5 75.97,2.3 C18.1@77.91,2.3 80.44,2.3 82.19,4.05 C19.1@84.3,4.05 ; v3(84.3,-2.03) C19.1@84.3,4
  Bottom Layer w0.864: v3(84.3,1.8) 84.3,-18.88 88.439,-23.019 v2(89.75,-23.019) v2(94.487,-23.019) v2(94.487,-26.78)
  other v3: 84.3,-0.115
VCC_USB: CE1.1 CE2.1 F2.1 LB1.2 USB1.1 USB1.5 USB1.9 USB2.1 USB2.5 USB2.9 | length 205.6
  Top Layer w0.279: LB1.2@82.27,-28.07 v2(83.77,-28.07)
  Top Layer w0.864: v3(114.6,-9.23) F2.1@114.6,2.9 ; USB1.9@138.237,-39.5 144.07,-39.5 145.55,-38.02 145.55,-23.11 143.94,-21.5 USB2.9@138.237,-21.5
  Top Layer w1.024: CE1.1@124.345,-38.621 129.486,-38.621 130.365,-39.5 USB1.1@132.997,-39.5 USB1.5@135.617,-39.5 USB1.9@138.237,-39.5 ; CE2.1@124.345,-20.621 129.486,-20.621 130.365,-21.5 USB2.1@132.997,-21.5 USB2.5@135.617,-21.5 USB2.9@138.237,-21.5
  Bottom Layer w0.279: v2(83.77,-28.07) 93.92,-38.22 131.717,-38.22 USB1.1@132.997,-39.5
  Bottom Layer w0.864: v3(114.6,-1.57) 114.6,-19.84 116.26,-21.5 USB2.1@132.997,-21.5 ; USB1.9@138.237,-39.5 144.07,-39.5 145.55,-38.02 145.55,-23.11 143.94,-21.5 USB2.9@138.237,-21.5
  Bottom Layer w1.024: USB1.1@132.997,-39.5 USB1.5@135.617,-39.5 USB1.9@138.237,-39.5 ; USB2.1@132.997,-21.5 USB2.5@135.617,-21.5 USB2.9@138.237,-21.5
  other v3: 114.6,-7.315 114.6,-5.4 114.6,-3.485
VCC_USB_5V: C14.1 C16.1 F2.2 L1.1 U2.4 | length 100.5
  Top Layer w0.864: C14.1@70.647,37.48 70.633,35.492 68.91,33.793 C16.1@68.897,31.967 68.897,28.463 69.92,27.44 113.18,27.44 114.6,26.02 F2.2@114.6,7.1
  Top Layer w1.07: C14.1@70.647,37.48 77.547,37.48 79.647,35.38 L1.1@79.647,32.63 84.127,32.63 87.927,36.43 U2.4@90.57,36.43
XRSTJ: C23.2 R31.2 U5.40 | length 9.2
  Top Layer w0.279: C23.2@82.271,-18.57 R31.2@82.271,-20.47 83.25,-20.47 86.56,-23.78 U5.40@88.2,-23.78
pads on no net: BT.0 CORE.9 CORE.10 CORE.13 CORE.14 CORE.15 CORE.16 CORE.17 CORE.20 CORE.21 CORE.22 CORE.28 CORE.48 CORE.59 CORE.67 CORE.68 CORE.71 CORE.72 D2.3 D2.4 T1.4 T1.5 T1.12 T1.13 TF.0 U5.3 U5.4 U5.5 U5.7 U5.44 U5.46 U5.47 U5.48

## Polygon pours and split planes (outlines as drawn)
GND on Bottom Layer "Top Layer-No Net" (solid, remove dead copper, pour order 2): 0,66 0,-66 150,-66 150,66
GND on Top Layer "Top Layer-No Net" (solid, remove dead copper, pour order 0): -0.154,65.857 -0.154,-66.143 149.846,-66.143 149.846,65.857

## Keep-outs
Keep-Out Layer:
  the board outline again, w0.254

## Other copper
Top Layer:
  region net VCC_5V: 31.35,28.69 30.09,28.69 30.09,22.85 31.35,22.85

## Silkscreen, mask and mechanical layers (free items; w line width, h text height)
Top Overlay:
  text "5V" at 13.393,59.74 h1
  text "3.3V" at 13.393,57.2 h1
  text "-TXD" at 13.393,54.66 h1
  text "-RXD" at 13.393,52.12 h1
  text "GND" at 13.393,49.58 h1
  text "-" at 122.442,31.97 h1
  text "+" at 126.402,31.97 h1
  text "RX_DEBUG" at 49.55,-14.807 h1 r180
  text "TX_DEBUG" at 49.55,-17.347 h1 r180
  text "GND" at 49.55,-19.803 h1 r180
  text "SCL" at 49.55,-24.883 h1 r180
  text "SDA" at 49.55,-27.423 h1 r180
  text "GND" at 49.55,-29.963 h1 r180
  text "3.3V" at 49.55,-32.503 h1 r180
  text "GND" at 46.64,-37.583 h1 r180
  text "3.3V" at 58.55,-37.58 h1 r180
  text "CS7" at 46.64,-40.123 h1 r180
  text "MISO" at 58.55,-40.12 h1 r180
  text "CLK" at 46.64,-42.663 h1 r180
  text "MOSI" at 58.384,-42.66 h1 r180
  text "CS5" at 46.64,-45.203 h1 r180
  text "CS6" at 57.717,-45.2 h1 r180
  text "Traffic VC4.2" at 66.09,-62.34 h3
Mechanical 15:
  lines w0.254: 0,-66 150,-66 ; 0,0 150,0 ; 0,66 150,66

## Dimensions
150,-68 to 0,68 on Mechanical 15
150,68 to 150,-68 on Mechanical 15

## Text inside footprints (layer, text, board x,y; h text height)
C1: Mechanical 18 "2" at 126.781,6.81 h0.5 r180; Mechanical 18 "1" at 128.681,6.81 h0.5 r180
C2: Mechanical 18 "1" at 105.84,-56.905 h0.5; Mechanical 18 "2" at 107.74,-56.905 h0.5
C3: Mechanical 18 "1" at 105.84,-59.45 h0.5; Mechanical 18 "2" at 107.74,-59.45 h0.5
C4: Mechanical 18 "1" at 107.34,-50.555 h0.5 r180; Mechanical 18 "2" at 105.44,-50.555 h0.5 r180
C5: Mechanical 18 "1" at 105.84,-53.095 h0.5; Mechanical 18 "2" at 107.74,-53.095 h0.5
C6: Mechanical 18 "2" at 98.834,-59.53 h0.5 r180; Mechanical 18 "1" at 100.734,-59.53 h0.5 r180
C7: Mechanical 18 "1" at 100.734,-50.44 h0.5 r180; Mechanical 18 "2" at 98.834,-50.44 h0.5 r180
C9: Mechanical 18 "1" at 137.9,16.05 h0.5 r270; Mechanical 18 "2" at 137.9,14.15 h0.5 r270
C13: Mechanical 18 "1" at 109.81,5.75 h0.5 r270; Mechanical 18 "2" at 109.81,3.85 h0.5 r270
C16: Mechanical 18 "2" at 69.097,31.967 h0.5; Mechanical 18 "1" at 67.197,31.967 h0.5
C17: Mechanical 18 "1" at 67.197,48.767 h0.5; Mechanical 18 "2" at 69.097,48.767 h0.5
C19: Mechanical 18 "1" at 84.3,5.75 h0.5 r270; Mechanical 18 "2" at 84.3,3.85 h0.5 r270
C20: Mechanical 18 "1" at 92.5,-35.46 h0.5 r270; Mechanical 18 "2" at 92.5,-37.36 h0.5 r270
C21: Mechanical 18 "1" at 94.4,-14.6 h0.5 r90; Mechanical 18 "2" at 94.4,-12.7 h0.5 r90
C22: Mechanical 18 "1" at 94.4,-35.45 h0.5 r270; Mechanical 18 "2" at 94.4,-37.35 h0.5 r270
C23: Mechanical 18 "2" at 80.171,-18.57 h0.5 r180; Mechanical 18 "1" at 82.071,-18.57 h0.5 r180
C24: Mechanical 18 "1" at 90.6,-14.6 h0.5 r90; Mechanical 18 "2" at 90.6,-12.7 h0.5 r90
C25: Mechanical 18 "1" at 96.3,-35.47 h0.5 r270; Mechanical 18 "2" at 96.3,-37.37 h0.5 r270
C26: Mechanical 18 "1" at 90.6,-35.46 h0.5 r270; Mechanical 18 "2" at 90.6,-37.36 h0.5 r270
C27: Mechanical 18 "1" at 88.7,-35.46 h0.5 r270; Mechanical 18 "2" at 88.7,-37.36 h0.5 r270
C28: Mechanical 18 "1" at 88.7,-14.6 h0.5 r90; Mechanical 18 "2" at 88.7,-12.7 h0.5 r90
C29: Mechanical 18 "1" at 96.3,-14.6 h0.5 r90; Mechanical 18 "2" at 96.3,-12.7 h0.5 r90
C30: Mechanical 18 "2" at 80.171,-31.87 h0.5 r180; Mechanical 18 "1" at 82.071,-31.87 h0.5 r180
C31: Mechanical 18 "2" at 80.17,-29.97 h0.5 r180; Mechanical 18 "1" at 82.07,-29.97 h0.5 r180
C32: Mechanical 18 "2" at 82.471,-22.37 h0.5; Mechanical 18 "1" at 80.571,-22.37 h0.5
LB1: Mechanical 18 "1" at 82.07,-28.07 h0.5 r180; Mechanical 18 "2" at 80.17,-28.07 h0.5 r180
LED1: Top Overlay "2" at 143.151,29.644 h1 r90; Top Overlay "1" at 141.297,29.771 h1 r90; Top Overlay "3" at 145.107,29.644 h1 r90; Top Overlay "4" at 146.936,29.594 h1 r90
LED2: Top Overlay "1" at 141.297,39.771 h1 r90; Top Overlay "2" at 143.151,39.644 h1 r90; Top Overlay "3" at 145.107,39.644 h1 r90; Top Overlay "4" at 146.936,39.594 h1 r90
R1: Mechanical 18 "1" at 15.352,12.13 h0.5 r90; Mechanical 18 "2" at 15.352,14.03 h0.5 r90
R2: Mechanical 18 "1" at 17.254,12.13 h0.5 r90; Mechanical 18 "2" at 17.254,14.03 h0.5 r90
R3: Mechanical 18 "1" at 28.659,12.13 h0.5 r90; Mechanical 18 "2" at 28.659,14.03 h0.5 r90
R4: Mechanical 18 "1" at 28.659,39.76 h0.5 r270; Mechanical 18 "2" at 28.659,37.86 h0.5 r270
R5: Mechanical 18 "1" at 30.56,12.13 h0.5 r90; Mechanical 18 "2" at 30.56,14.03 h0.5 r90
R6: Mechanical 18 "1" at 30.56,39.76 h0.5 r270; Mechanical 18 "2" at 30.56,37.86 h0.5 r270
R7: Mechanical 18 "1" at 32.46,39.76 h0.5 r270; Mechanical 18 "2" at 32.46,37.86 h0.5 r270
R8: Mechanical 18 "1" at 32.46,12.13 h0.5 r90; Mechanical 18 "2" at 32.46,14.03 h0.5 r90
R9: Mechanical 18 "1" at 26.759,39.76 h0.5 r270; Mechanical 18 "2" at 26.759,37.86 h0.5 r270
R10: Mechanical 18 "1" at 24.858,39.76 h0.5 r270; Mechanical 18 "2" at 24.858,37.86 h0.5 r270
R11: Mechanical 18 "1" at 22.958,39.76 h0.5 r270; Mechanical 18 "2" at 22.958,37.86 h0.5 r270
R12: Mechanical 18 "1" at 21.057,39.76 h0.5 r270; Mechanical 18 "2" at 21.057,37.86 h0.5 r270
R13: Mechanical 18 "2" at 22.958,11.73 h0.5 r270; Mechanical 18 "1" at 22.958,13.63 h0.5 r270
R14: Mechanical 18 "2" at 21.057,11.73 h0.5 r270; Mechanical 18 "1" at 21.057,13.63 h0.5 r270
R15: Mechanical 18 "1" at 13.451,38.26 h0.5 r90; Mechanical 18 "2" at 13.451,40.16 h0.5 r90
R16: Mechanical 18 "1" at 11.549,38.26 h0.5 r90; Mechanical 18 "2" at 11.549,40.16 h0.5 r90
R17: Mechanical 18 "2" at 19.156,11.73 h0.5 r270; Mechanical 18 "1" at 19.156,13.63 h0.5 r270
R18: Mechanical 18 "1" at 15.352,38.26 h0.5 r90; Mechanical 18 "2" at 15.352,40.16 h0.5 r90
R19: Mechanical 18 "1" at 17.254,38.26 h0.5 r90; Mechanical 18 "2" at 17.254,40.16 h0.5 r90
R20: Mechanical 18 "1" at 19.156,38.26 h0.5 r90; Mechanical 18 "2" at 19.156,40.16 h0.5 r90
R21: Mechanical 18 "1" at 127.181,-7.79 h0.5; Mechanical 18 "2" at 129.081,-7.79 h0.5
R22: Mechanical 18 "1" at 127.181,-5.357 h0.5; Mechanical 18 "2" at 129.081,-5.357 h0.5
R23: Mechanical 18 "1" at 127.181,-2.923 h0.5; Mechanical 18 "2" at 129.081,-2.923 h0.5
R24: Mechanical 18 "1" at 127.181,-0.49 h0.5; Mechanical 18 "2" at 129.081,-0.49 h0.5
R25: Mechanical 18 "1" at 127.181,1.943 h0.5; Mechanical 18 "2" at 129.081,1.943 h0.5
R26: Mechanical 18 "1" at 127.181,4.377 h0.5; Mechanical 18 "2" at 129.081,4.377 h0.5
R27: Mechanical 18 "2" at 124.08,-59.445 h0.5 r180; Mechanical 18 "1" at 125.98,-59.445 h0.5 r180
R28: Mechanical 18 "2" at 124.08,-56.905 h0.5 r180; Mechanical 18 "1" at 125.98,-56.905 h0.5 r180
R29: Mechanical 18 "2" at 124.08,-53.095 h0.5 r180; Mechanical 18 "1" at 125.98,-53.095 h0.5 r180
R30: Mechanical 18 "2" at 124.08,-50.555 h0.5 r180; Mechanical 18 "1" at 125.98,-50.555 h0.5 r180
R31: Mechanical 18 "2" at 80.171,-20.47 h0.5 r180; Mechanical 18 "1" at 82.071,-20.47 h0.5 r180
R32: Mechanical 18 "1" at 92.5,-14.6 h0.5 r90; Mechanical 18 "2" at 92.5,-12.7 h0.5 r90
R33: Mechanical 18 "2" at 80.171,-26.17 h0.5 r180; Mechanical 18 "1" at 82.071,-26.17 h0.5 r180
R34: Mechanical 18 "2" at 80.171,-24.27 h0.5 r180; Mechanical 18 "1" at 82.071,-24.27 h0.5 r180